# Altium PCB final design- mpu centred(Altium).pcbdoc
Units mil, origin at the board's own origin, x right, y up, seen from the top; angles counter-clockwise.
Board outline 4770 x 4410 mil, 2 copper layers (Top Layer, Bottom Layer); 66 components, 78 nets, 248 pads, 33 vias.
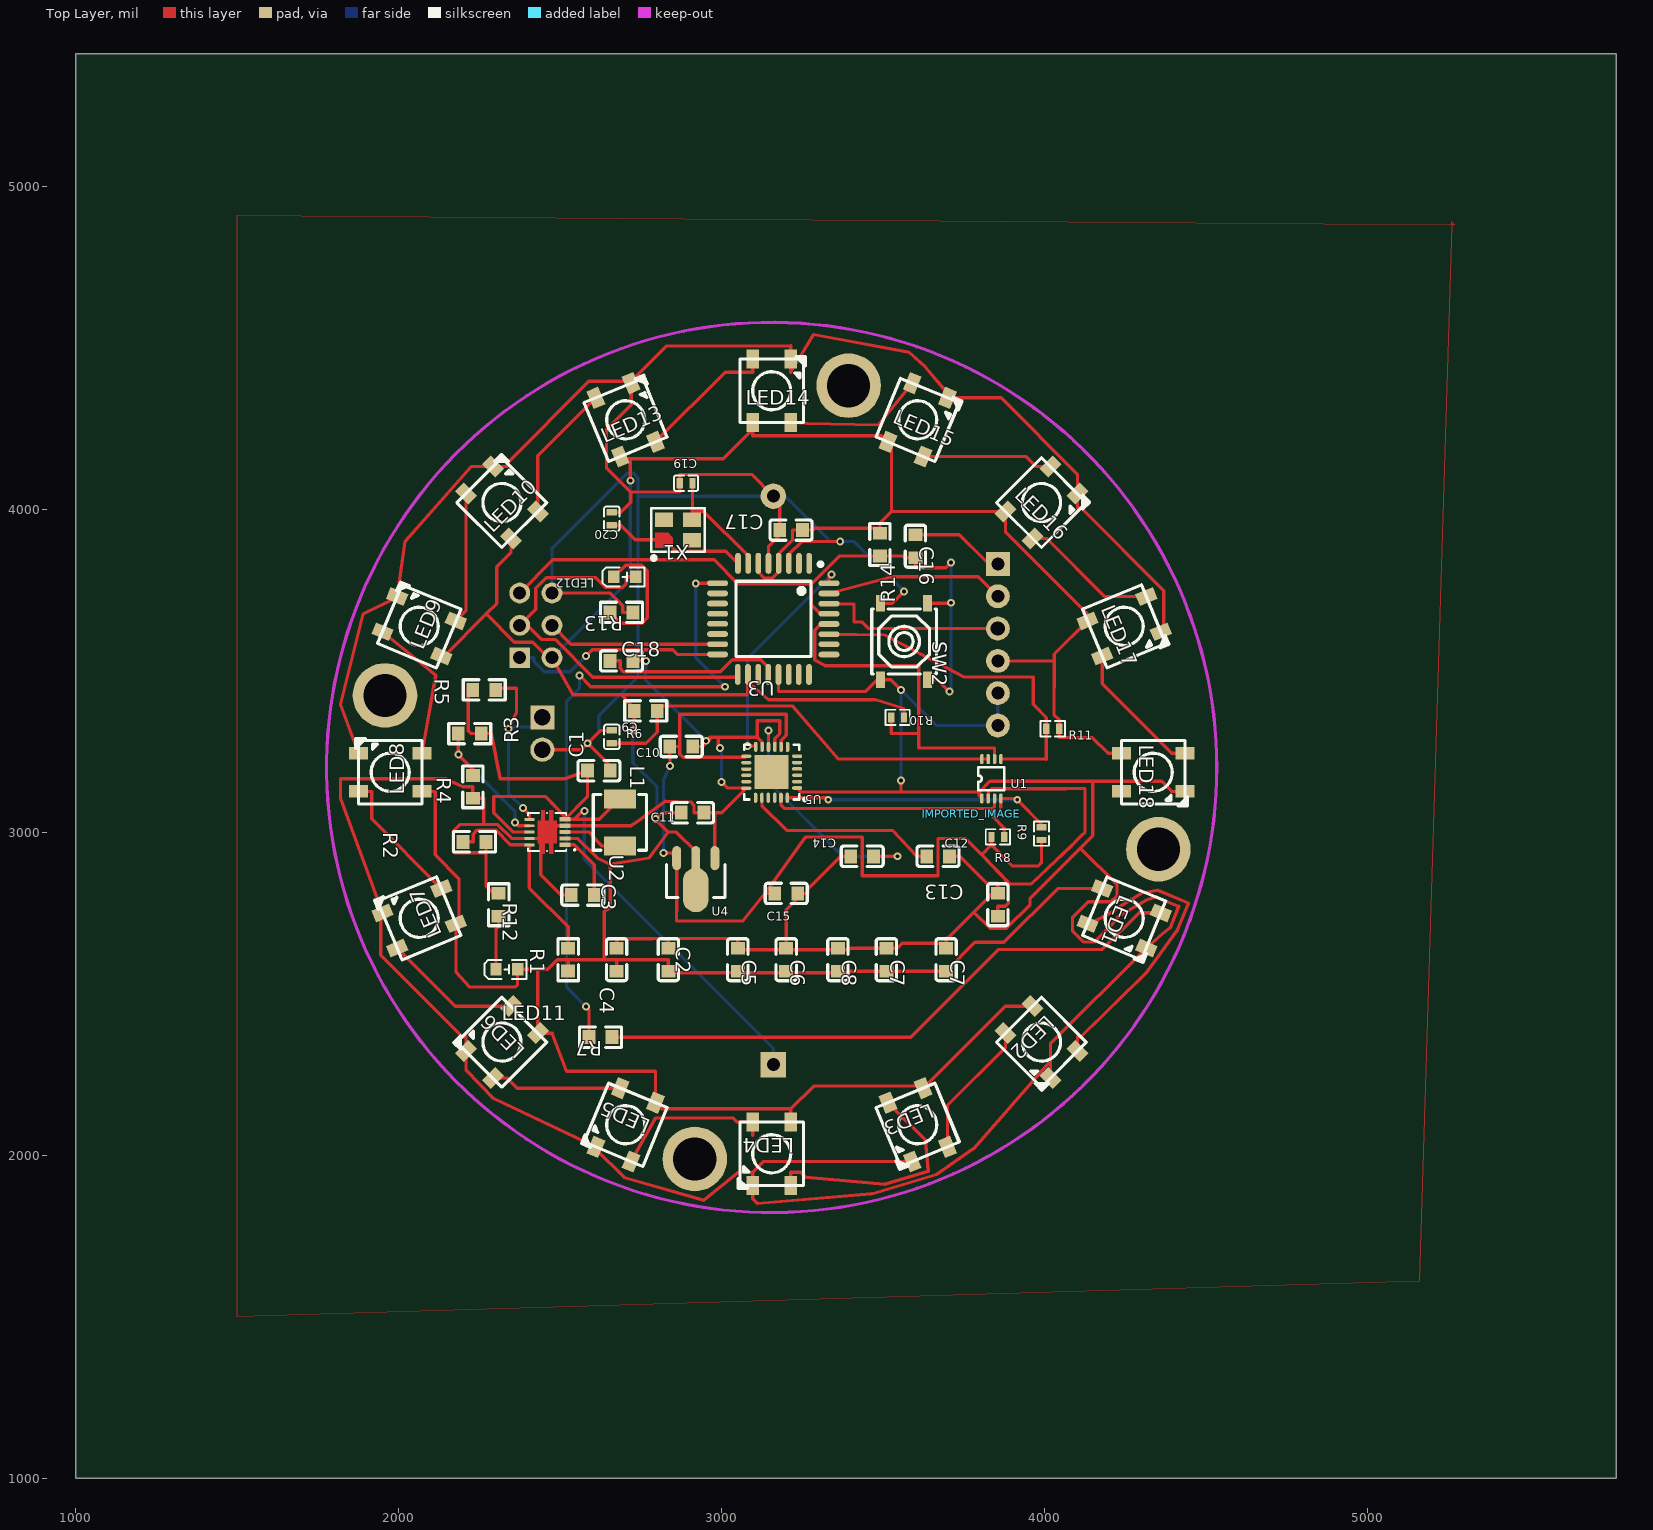
[diagram p0: Top Layer view]
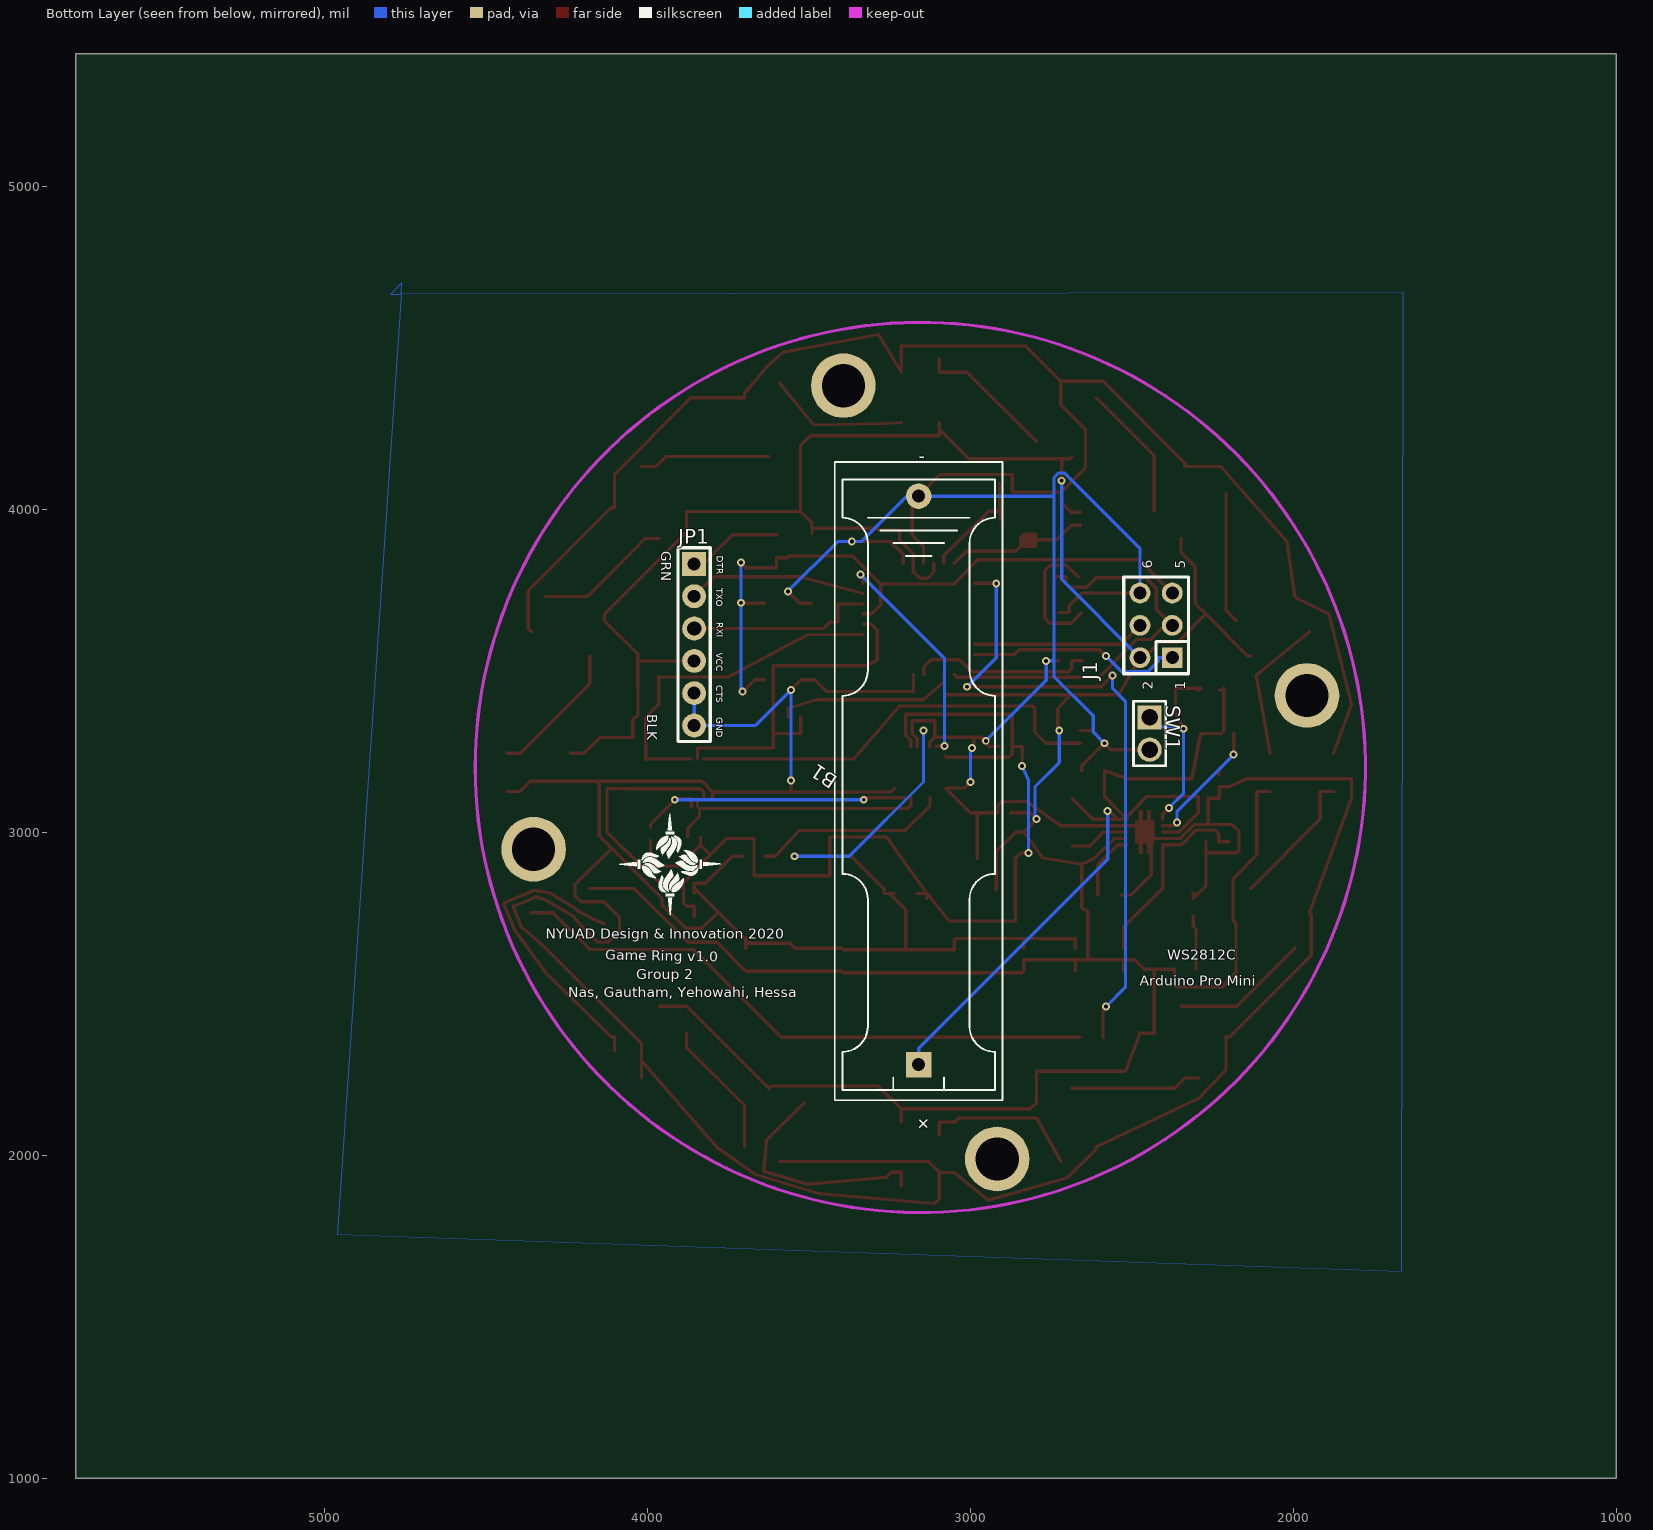
[diagram p1: Bottom Layer view, seen from below]

## Layer stack, top to bottom
Top Layer: signal copper (thickness not stored)
Dielectric: dielectric 12.6, FR-4, Dk 4.8
Bottom Layer: signal copper (thickness not stored)

## Board outline
5770,1000 1000,1000 1000,5410 5770,5410

## Components (designator, comment, footprint, x,y, rotation, side; value= is the part's Value field where it differs from the comment)
B1 "BS-2-1" KEYSTONE_2466_1XAAA 3160,3160 r270 bottom
C1 "10uF" C0603 2620,3190 r180 top
C2 "10uF" C0603 2835,2605 r270 top
C3 "1uF" C0603 2570,2805 r0 top
C4 "10uF" C0603 2675,2605 r270 top
C5 "1uF" C0603 3050,2605 r270 top
C6 "1uF" C0603 3200,2605 r270 top
C7 "1uF" C0603 3695,2605 r270 top
C7 "1uF" C0603 3510,2605 r270 top
C8 "1uF" C0603 3360,2605 r270 top
C9 "100pF" C0402 2660,3295 r270 top
C10 "10uF" C0603 2875,3265 r180 top
C11 "10uF" C0603 2910,3060 r180 top
C12 "2.2nF" C0603 3670,2925 r180 top
C13 "100nF" C0603 3855,2775 r270 top
C14 "100nF" C0603 3435,2925 r0 top
C15 "10nF" C0603 3200,2810 r180 top
C16 "100nF" C0603 3600,3885 r270 top
C17 "100nF" C0603 3215,3935 r180 top
C18 "100nF" C0603 2690,3530 r0 top
C19 "10pF" C0402 2890,4080 r0 top
C20 "10pF" C0402 2660,3970 r270 top
IMPORTED_IMAGE "IMPORTED_IMAGE" IMPORTED_IMAGE 3772.55,3056.6 r0 top
J1 "ICSP" HEADER_PRG_2X03 2425,3640 r270 bottom
JP1 "FTDI" FTDI 3855,3580 r90 bottom
L1 "2.2uH" IND-SMD_L4.4-W4.2 2685,3030 r270 top
LED1 "WS2812C" LED-SMD_4P-L5.0-W5.0-BL 4246.18,2732.99 r247.5 top
LED2 "WS2812C" LED-SMD_4P-L5.0-W5.0-BL 3990.16,2349.84 r225 top
LED3 "WS2812C" LED-SMD_4P-L5.0-W5.0-BL 3607.01,2093.82 r202.5 top
LED4 "WS2812C" LED-SMD_4P-L5.0-W5.0-BL 3155,2003.9 r180 top
LED5 "WS2812C" LED-SMD_4P-L5.0-W5.0-BL 2702.99,2093.82 r157.5 top
LED6 "WS2812C" LED-SMD_4P-L5.0-W5.0-BL 2319.84,2349.84 r135 top
LED7 "WS2812C" LED-SMD_4P-L5.0-W5.0-BL 2063.82,2732.99 r112.5 top
LED8 "WS2812C" LED-SMD_4P-L5.0-W5.0-BL 1973.9,3185 r90 top
LED9 "WS2812C" LED-SMD_4P-L5.0-W5.0-BL 2063.82,3637.01 r67.5 top
LED10 "WS2812C" LED-SMD_4P-L5.0-W5.0-BL 2319.84,4020.16 r45 top
LED11 "MHT192WDT-C2" LED0603-RD 2335,2575 r0 top
LED12 "MHT192WDT-C2" LED0603-RD 2700,3790 r0 top
LED13 "WS2812C" LED-SMD_4P-L5.0-W5.0-BL 2702.99,4276.18 r22.5 top
LED14 "WS2812C" LED-SMD_4P-L5.0-W5.0-BL 3155,4366.1 r0 top
LED15 "WS2812C" LED-SMD_4P-L5.0-W5.0-BL 3607.01,4276.18 r337.5 top
LED16 "WS2812C" LED-SMD_4P-L5.0-W5.0-BL 3990.16,4020.16 r315 top
LED17 "WS2812C" LED-SMD_4P-L5.0-W5.0-BL 4246.18,3637.01 r292.5 top
LED18 "WS2812C" LED-SMD_4P-L5.0-W5.0-BL 4336.1,3185 r270 top
R1 "1.8M" R0603 2525,2605.04 r270 top
R2 "200K" R0603 2235,2970 r180 top
R3 "51K" R0603 2220,3305 r0 top
R4 "270K" R0603 2230,3140 r90 top
R5 "51K" R0603 2265,3440 r0 top
R6 "200K" R0603 2765,3375 r180 top
R7 "330" R0603 2625,2365 r180 top
R8 "2.2K" R0402 3855,2985 r180 top
R9 "2.2K" R0402 3990,2995 r270 top
R10 "2.2K" R0402 3545,3355 r0 top
R11 "2.2K" R0402 4025,3320 r0 top
R12 "470" R0603 2310,2775 r270 top
R13 "470" R0603 2690,3680 r180 top
R14 "10K" R0603 3490,3890 r90 top
SW1 "Header-Male-2.54_1x2" HDR-2X1/2.54 2445,3305 r0 bottom
SW2 "TS-1187A-B-A-B" SW-SMD_4P-L5.1-W5.1-P3.70-LS6.4 3565,3590 r270 top
U1 "PCA9306DCUR" VSSOP-8_L2.4-W2.1-P0.50-LS3.2-BL 3835,3165 r0 top
U2 "TPS61200DRCR" VSON-10_L3.0-W3.0-P0.50-BL-EP_TPS62410DRCR 2460,3000 r90 top
U3 "ATMEGA328P-AU" TQFP-32_L7.0-W7.0-P0.80-LS9.0-BL 3160,3660 r180 top
U4 "HT7533-1_C14289" SOT-89-3_L4.5-W2.5-P1.50-LS4.2-BR 2920,2870 r90 top
U5 "MPU-6050_C24112" QFN-24_4X4X05P 3155,3185 r180 top
X1 "16MHz" OSC-SMD_4P-L3.2-W2.5-BL 2865,3935 r0 top

## Footprints (in the part's own frame and the unit in brackets; to place one, negate y for a bottom-side part, rotate by r counter-clockwise, add the part's x,y. Pads: shape width x height; smd on the part's side, far side on the other; paste and mask are expansions set on the pad)
C0402 [mm]
  rect 0.5x0.8 smd: 1(-0.5,0) 2(0.5,0)
  silkscreen extent -0.95,-0.6 0.95,0.6
C0603 [mm]
  rect 1x1.1 smd: 1(-0.9,0) 2(0.9,0)
  silkscreen extent -1.65,-0.8 1.65,0.8
FTDI [mil]
  rect 74x74 hole 40: 1(250,0)
  round 74 hole 40: 2(150,0) 4(-50,0) 5(-150,0) 6(-250,0)
  round 74 hole 44.4: 3(50,0)
  silkscreen extent -300,-50 300,50
HDR-2X1/2.54 [mm]
  rect 1.9x1.9 hole 1.3: 1(0,-1.27)
  round 1.9 hole 1.3: 2(0,1.27)
  silkscreen extent -1.27,-2.54 1.27,2.54
HEADER_PRG_2X03 [mil]
  rect 64.3x64.3 hole 40.2: 1(100,50)
  round 64.3 hole 40.2: 2(100,-50) 3(0,50) 4(0,-50) 5(-100,50) 6(-100,-50)
  silkscreen extent -150,-100 150,100
IMPORTED_IMAGE [mil]
IND-SMD_L4.4-W4.2 [mm]
  rect 1.5x2.5 smd: 1(-1.85,0) 2(1.85,0)
  silkscreen extent -2.2,-2.1 2.2,2.1
KEYSTONE_2466_1XAAA [mm]
  rect 2x2 hole 1.02: 1(22.35,0)
  round 2 hole 1.02: 2(-22.349,0)
  silkscreen extent -25.05,-6.6 25.15,6.6
LED0603-RD [mm]
  rect 0.9x1 smd: 1(-0.85,0) 2(0.85,0)
  silkscreen extent -1.75,-0.75 1.55,0.75
LED-SMD_4P-L5.0-W5.0-BL [mil]
  rect 39.3x59 smd: 1(-59.05,-98.42) 2(59.05,-98.42)
  rect 39.3x59.1 smd: 3(59.05,98.43) 4(-59.05,98.43)
  silkscreen extent -98,-98 104,106
OSC-SMD_4P-L3.2-W2.5-BL [mm]
  round 0 smd: 1(-1.1,-0.8)
  rect 1.4x1.15 smd: 2(1.1,-0.8) 3(1.1,0.8) 4(-1.1,0.8)
  Top Layer region: -1.8,-0.225 -0.762,-0.225 -0.4,-0.604 -0.4,-1.375 -1.8,-1.375
  silkscreen extent -2.1,-2.35 2.1,1.7
QFN-24_4X4X05P [mm]
  oval 0.796x0.28 smd: 1(-2,1.232) 2(-2,0.732) 3(-2,0.231) 4(-2,-0.267) 5(-2,-0.767) 6(-2,-1.267) 13(2,-1.257) 14(2,-0.757) 15(2,-0.257) 16(2,0.241) 17(2,0.742) 18(2,1.242)
  oval 0.28x0.796 smd: 7(-1.245,-2) 8(-0.744,-2) 9(-0.244,-2) 10(0.254,-2) 11(0.754,-2) 12(1.255,-2) 19(1.27,2) 20(0.77,2) 21(0.269,2) 22(-0.229,2) 23(-0.729,2) 24(-1.229,2)
  rect 2.68x2.68 smd: 25(0,-0.013)
  silkscreen extent -2.84,-2.16 2.15,2.35
R0402 [mm]
  rect 0.5x0.8 smd: 1(-0.5,0) 2(0.5,0)
  silkscreen extent -0.95,-0.6 0.95,0.6
R0603 [mm]
  rect 1x1.1 smd: 1(-0.9,0) 2(0.9,0)
  silkscreen extent -1.65,-0.8 1.65,0.8
SOT-89-3_L4.5-W2.5-P1.50-LS4.2-BR [mm]
  oval 1.9x0.7 smd: 1(1.25,-1.501) 3(1.25,1.501)
  oval 3.5x2 smd: 2(-1.25,0)
  oval 2.1x0.7 smd: 2(1.151,0)
  silkscreen extent -1.85,-2.3 0.75,2.3
SW-SMD_4P-L5.1-W5.1-P3.70-LS6.4 [mil]
  rect 51.18x27.56 smd: 1(-118.1,72.84) 2(118.11,72.84) 3(-118.1,-72.83) 4(118.11,-72.83)
  silkscreen extent -100,-100 100,100
TQFP-32_L7.0-W7.0-P0.80-LS9.0-BL [mm]
  oval 0.45x1.65 smd: 1(-2.817,-4.369) 2(-2.017,-4.369) 3(-1.217,-4.369) 4(-0.417,-4.369) 5(0.381,-4.369) 6(1.181,-4.369) 7(1.981,-4.369) 8(2.781,-4.369) 17(2.791,4.369) 18(1.991,4.369) 19(1.191,4.369) 20(0.391,4.369) 21(-0.406,4.369) 22(-1.207,4.369) 23(-2.007,4.369) 24(-2.807,4.369)
  oval 1.65x0.45 smd: 9(4.381,-2.804) 10(4.381,-2.004) 11(4.381,-1.204) 12(4.381,-0.404) 13(4.381,0.394) 14(4.381,1.194) 15(4.381,1.994) 16(4.381,2.794) 25(-4.381,2.804) 26(-4.381,2.004) 27(-4.381,1.204) 28(-4.381,0.404) 29(-4.381,-0.394) 30(-4.381,-1.194) 31(-4.381,-1.994) 32(-4.381,-2.794)
  silkscreen extent -3.86,-4.45 2.94,2.95
VSON-10_L3.0-W3.0-P0.50-BL-EP_TPS62410DRCR [mm]
  rect 0.34x0.85 smd: 1(-1,-1.4) 2(-0.5,-1.4) 3(0,-1.4) 4(0.5,-1.4) 5(1,-1.4)
  rect 0.23x0.8 smd: 6(1,1.4) 7(0.5,1.4) 8(0,1.4) 9(-0.5,1.4) 10(-1,1.4)
  round 0 smd: 11(0.005,0)
  Top Layer region: -0.89,-0.76 -0.89,-0.47 -1.71,-0.47 -1.71,-0.18 -0.88,-0.18 -0.88,0.18 -1.71,0.18 -1.71,0.47 -0.88,0.47 -0.88,0.76 0.89,0.76 0.89,0.47 1.71,0.47 1.71,0.18 0.89,0.18 0.89,-0.18 1.71,-0.18 1.71,-0.47 0.89,-0.47 0.89,-0.76 -0.89,-0.76 -0.89,-0.76 -0.89,-0.76
  silkscreen extent -1.5,-2.21 1.5,1.52
VSSOP-8_L2.4-W2.1-P0.50-LS3.2-BL [mm]
  oval 0.28x0.796 smd: 1(-0.75,-1.55) 2(-0.25,-1.55) 3(0.25,-1.55) 4(0.75,-1.55) 5(0.75,1.55) 6(0.25,1.55) 7(-0.25,1.55) 8(-0.75,1.55)
  silkscreen extent -1.02,-0.9 1,0.9

## Free pads (board coordinates)
  round 200 hole 133.86: 3(1957.99,3423.11) 3(2916.89,1987.99) 3(3393.11,4382.01) 3(4352.01,2946.89)

## Via types
v1: diameter 24.41, hole 12, Top Layer to Bottom Layer, 25 vias
v2: diameter 24.41, hole 12.2, Top Layer to Bottom Layer, 8 vias

## Nets (pads, with @x,y where several pads share a name; then routed paths per layer and width w, separated by ;. In a path a pad name is that pad's centre, name@x,y a point inside that pad or via, vN(x,y) a via of type N, cw(c..) or ccw(c..) an arc to the next point about the centre after c; other vN are vias at no path point)
3.3V: C10.2 C13.2 C15.2 R8.2 R9.2 U1.2 U4.3 U5.8 U5.13 | length 4089.6
  Top Layer w10: C10.2 v1(2840,3205)
  Top Layer w10.24: v1(2820,2935) 2845.1,2935 U4.3 2860.9,2777.6 2860,2725 3065,2725 3133.4,2810 C15.2 ; C10.2 2870.8,3265 ; U5.13 3073.6,3231.8 2880.5,3231.8 2870.8,3241.6 2870.8,3265 ; 3135,2795 3135,2810.6 3260,2985 3435,2985 3435,2935 3435,2890 3435,2865 3670,2865 3670,2885 3670,2980 3755,2980 3805,2930 ; U5.8 3185,3285 3200,3300 3200,3365 2870.8,3365 2870.8,3265 ; U1.2 3825.2,3122.8 3836.4,3134 4066.8,3134 4125,3135 4125,3000 4115,2990 4100,2975 4085,2960 3959.2,2839.4 3891.1,2839.4 ; 3835,2960 3805,2930 ; R8.2 3835.3,2957.7 3837.3,2957.7 3900,2895 3980,2895 3990,2905 R9.2 ; C13.2 3855,2770.8 3878.4,2770.8 3888.2,2780.5 3888.2,2836.5 3891.1,2839.4 ; 3805,2930 3891.1,2839.4
  Bottom Layer w10: v1(2820,2935) 2820,3160 v1(2840,3205)
5V: C2.2 C4.2 C5.2 C6.2 C7.2 C8.2 C11.2 C17.1 J1.2 JP1.4 LED1.1 LED2.1 LED3.1 LED4.1 LED5.1 LED6.1 LED7.1 LED8.1 LED9.1 LED10.1 LED11.2 LED13.1 LED14.1 LED15.1 LED16.1 LED17.1 LED18.1 R1.2 R6.2 R10.2 R11.2 R14.2 U2.2 U3.4 U3.6 U3.18 U4.2 | length 12597
  Top Layer w10: LED7.1@2177.35,2716.1 2177.35,2567.65 2220,2520 2360,2520 2368.46,2526.54 LED11.2 ; C4.2 2675,2604.6 ; v1(2725,3315) 2729.57,3319.57 R6.2 ; JP1.4 4030,3530
  Top Layer w10.24: LED8.1@2072.3,3125.9 2113.3,3125.9 2113.3,2929.7 2186.9,2856.2 2186.9,2725.6 LED7.1@2177.4,2716.1 ; LED9.1 2141,3544.8 2271.5,3675.2 ; LED10.1 2347.7,3864.7 2303.6,3820.7 2303.6,3707.4 2271.5,3675.2 ; LED11.2 2431.2,2575 ; U2.2@2515.1,2980 2555,2980 2614.6,2920.4 2655,2900 ; R1.2 2525,2604.6 ; LED13.1@2686.1,4162.6 2692.8,4155.9 2717.4,4155.9 ; v2(2717.4,4087.7) 2717.4,4155.9 ; R6.2 2729.57,3382.63 2690,3425 ; C2.2@2835,2568.4 2838.8,2564.6 3050,2564.6 3200,2564.6 3360,2564.6 3376.6,2564.6 3393.2,2564.6 3398.2,2569.6 3510,2569.6 3695,2569.6 3784.1,2658.7 3873.7,2658.7 4040.2,2825.2 LED1.1@4177.9,2825.2 ; C2.2@2835,2573.8 2835,2605 2720,2605 2708.2,2604.6 2675,2604.6 2636.4,2604.6 ; C11.2 2843.4,3060 2815,3060 v1(2795,3040) 2835,3000 ; U4.2@2920,2820.8 2920,2915.3 2920,2940 2860,3000 2835,3000 ; LED14.1 LED14.1@3096,4247.2 ; U3.6 3113.5,3805.1 3132.5,3786.1 3156.1,3786.1 3176.4,3806.4 U3.4 3176.4,3861 3219.2,3903.8 3219.2,3935 C17.1 3250.9,3935 3281.6,3935 3287.7,3941 R14.2@3490,3941 ; LED4.1@3214.1,2102.3 3214.1,2122.8 3214.1,2143.3 ; R14.2 R14.2@3490,3941 ; R10.2 3564.7,3382.3 3475,3410 3145,3410 3081.6,3465 U3.18 3080,3425 2690,3425 ; LED2.1 3877.8,2461.2 LED3.1 3617.3,2213.9 3284.7,2213.9 3214.1,2143.3 ; LED17.1@4132.65,3653.9 4030,3551.25 4030,3530 4028.8,3363.2 4044.7,3347.3 R11.2 4044.7,3292.7 4148,3292.7 4196.7,3244 LED18.1 ; LED17.1 4132.7,3673.8 3878.8,3927.7 LED16.1 3525.7,3992.3 ; 2271.5,3675.2 2358.6,3588 2415.2,3588 2463.2,3540 J1.2 2540,3425 2670,3425 2690,3425 ; 2431.2,2575 2462.3,2575 2491.8,2604.6 2525,2604.6 ; 2431.2,2575 LED6.1 2475.3,2377.7 2520,2260 2795,2260 2795,2225 2795.2,2162.1 2814,2143.3 3214.1,2143.3 ; 2525,2604.6 2636.4,2604.6 ; 2636.4,2604.6 2636.4,2754.1 2655,2765 2655,2900 ; 2655,2900 2775,2920 2835,3000 ; 2717.4,4155.9 3004.7,4155.9 LED14.1@3096,4247.2 ; LED14.1@3096,4247.2 3096,4226.7 3496,4226.7 LED15.1 3525.7,4196.9 3525.7,3992.3 ; R14.2@3490,3941 3490,3956.6 3525.7,3992.3
  Bottom Layer w10: v1(2725,3315) 2725,3215 2800,3140 2800,3045 v1(2795,3040)
  Bottom Layer w10.24: J1.2 2717.4,3782.4 v2(2717.4,4087.7)
A0: U3.23
A1: U3.24
A2: U3.25
A3: U3.26
A6: U3.19
A7: U3.22
D1_OUT_D2_IN: LED1.2 LED2.4 | length 938.9
  Top Layer w10.24: LED2.4 4101.5,2366.1 4112.5,2366.1 4315,2565 4410,2695 4445,2780 4350,2820 4301.3,2811.2 4225,2765 4215,2755 4165,2730 LED1.2
D2_OUT_D3_IN: LED2.2 LED3.4 | length 426.6
  Top Layer w10.24: LED3.4 3699.2,2154 3878.8,2333.6 LED2.2
D3: U3.1
D3_OUT_D4_IN: LED3.2 LED4.4 | length 740.7
  Top Layer w10.24: LED4.4@3214.1,1905.5 3214.1,1946.5 3245.2,1946.5 3260.6,1931.1 3505,1910 3640,1950 3631.3,2045.6 LED3.2@3514.8,2162.1
D4: U3.2
D4_OUT_D5_IN: LED4.2 LED5.4 | length 501.4
  Top Layer w10.24: LED5.4 2795,2115 3035,2115 3047.68,2102.32 LED4.2 ; 3096,2061.3 LED4.2
D5_OUT_D6_IN: LED5.2 LED6.4 | length 407.1
  Top Layer w10.24: LED6.4 2336.1,2238.5 2367.2,2207.3 LED5.2
D6: U3.10
D6_OUT_D7_IN: LED6.2 LED7.4 | length 426.6
  Top Layer w10.24: LED7.4 2175.1,2461.2 LED6.2
D7: U3.11
D7_OUT_D8_IN: LED7.2 LED8.4 | length 431.1
  Top Layer w10.24: LED8.4@1875.5,3125.9 1916.5,3125.9 1916.5,3040.8 LED7.2
D8: U3.12
D8_OUT_D9_IN: LED8.2 LED9.4 | length 457.7
  Top Layer w10.24: LED9.4 2115,3485 LED8.2
D9: U3.13
D9_OUT_D10_IN: LED9.2 LED10.4 | length 407
  Top Layer w10.24: LED9.2@2177.4,3653.9 2208.5,3685 LED10.4
D10: U3.14
D10_OUT_D11_IN: LED10.2 LED13.4 | length 426.6
  Top Layer w10.24: LED10.2 2431.2,4164.9 LED13.4
D11: J1.4 U3.15 | length 536.7
  Top Layer w10.24: J1.4 2533.5,3581.5 U3.15
D11_OUT_D12_IN: LED13.2 LED14.4 | length 431.1
  Top Layer w10.24: LED13.2 3010.9,4423.5 3096,4423.5 LED14.4
D12: J1.1 U3.16 | length 670.9
  Top Layer w10.24: v2(2580.6,3545.1) 2599.5,3564 2848.9,3564 2862.9,3550 U3.16
  Bottom Layer w10.24: J1.1 2418.7,3540 2418.7,3529.1 2451.4,3496.3 2531.8,3496.3 v2(2580.6,3545.1)
D12_OUT_D13_IN: LED14.2 LED15.4 | length 438
  Top Layer w10.24: LED14.2@3214.1,4267.7 3265,4265 3485,4260 LED15.4
D13: J1.3 LED12.2 U3.17 | length 1241.3
  Top Layer w10.24: LED12.2 2704.2,3790 2704.2,3768.1 2693.9,3757.7 2639.9,3757.7 2610.2,3787.4 2457,3787.4 2425,3755.4 2425,3690 J1.3 2398.5,3640 2442.2,3596.3 2484.2,3596.3 2600.9,3479.7 3041.8,3479.7 U3.17
D13_OUT_D14_IN: LED15.2 LED16.4 | length 407
  Top Layer w10.24: LED15.2@3623.9,4162.6 3942.8,4162.6 3973.9,4131.5 LED16.4
D14_OUT_D15_IN: LED16.2 LED17.4 | length 426.6
  Top Layer w10.24: LED16.2 4006.4,3908.8 4186,3729.2 LED17.4
D15_OUT_D16_IN: LED17.2 LED18.4 | length 431.1
  Top Layer w10.24: LED17.2@4177.9,3544.8 4177.9,3459.7 4393.5,3244 LED18.4
D16_OUT_D17_IN: LED18.2
DTR: C16.1 JP1.1 | length 292.4
  Top Layer w10.24: C16.1 3736.1,3920.4 3806.5,3850 3826.5,3830 JP1.1
FB: R1.1 R2.2 U2.10 | length 623.2
  Top Layer w10.24: R2.2 2230.8,2970 2230.8,2993.4 2244,3006.7 2300.3,3006.7 2346.3,2960.6 U2.10 2404.9,2826.7 2525,2706.6 R1.1
GND: B1.2 C1.1 C2.1 C3.1 C4.1 C5.1 C6.1 C7.1 C8.1 C9.1 C10.1 C11.1 C12.1 C13.1 C14.1 C15.1 C17.2 C18.2 C19.1 C20.1 J1.6 JP1.5 JP1.6 LED1.3 LED2.3 LED3.3 LED4.3 LED5.3 LED6.3 LED7.3 LED8.3 LED9.3 LED10.3 LED13.3 LED14.3 LED15.3 LED16.3 LED17.3 LED18.3 R2.1 R4.1 R12.1 R13.1 SW1.2 SW2.3 SW2.4 U1.1 U2.4 U2.9 U2.11 U3.3 U3.5 U3.21 U4.1 U5.1 U5.9 U5.11 U5.18 | length 22427.1
  Top Layer w10: LED8.3 1820,3395 1890,3675 1991.25,3725 LED9.3 ; SW1.2 2565,3255 v1(2585,3275) ; v1(3000,3155) 3018.9,3136.1 U5.18 ; SW2.3 3528.11,3708.11 v1(3565,3745) ; 3555,3123.9 v1(3555,3160)
  Top Layer w10.24: LED9.3 2020,3900 2224.8,4131.5 LED10.3 2336.1,4131.5 2336.1,4142.5 2589.3,4395.7 LED13.3@2719.9,4395.7 ; R2.1 2270.4,2935.9 ; R12.1 2310,2794.8 2270.4,2834.4 2270.4,2935.9 ; J1.6 2654.8,3740 2694.2,3700.6 2694.2,3680 R13.1 ; C3.1 2503.4,2805 2440.3,2868.1 2440.3,2980.3 ; v1(2585,3275) 2585.32,3274.68 v1@2585.52,3274.68 ; C1.1 2655.43,3204.77 v1@2585.52,3274.68 ; C9.1 2625.48,3314.68 v1@2585.5,3274.7 ; C20.1 2687.3,3989.7 2718.8,4021.2 2718.8,4052.7 ; C4.1 2675,2670 2770,2670 2785,2670 2818.4,2670.4 2835,2670.4 ; C18.2 v2(2765.3,3530) ; C2.1 2835,2670.4 ; C10.1 2941.6,3265 2963.2,3286.5 2963.2,3293.5 ; v2(2952.2,3282.6) 2963.2,3293.5 ; U4.1 2979.1,3060 ; 2989.85,3293.5 2989.85,3265.15 v1(2995,3260) ; U5.18 3000.2,3060 2979.1,3060 ; U5.11 3125.3,3278.4 3110.1,3293.5 ; U3.5 3145,3883.8 3179.6,3918.4 C17.2 3179.6,4020.3 B1.2 3092.7,4107.2 2870.3,4107.2 C19.1 2870.3,4070.5 2870.3,4052.7 2718.8,4052.7 ; U5.9 3164.6,3289.6 3180,3305 3180,3310 3180,3345 3110,3345 3110.1,3293.5 ; U3.21 3176,3435 3445,3435 3481.89,3471.89 SW2.4 3523.11,3471.89 v1(3555,3440) ; U3.3 3207.9,3859.7 3247.5,3899.3 v2(3367.1,3899.3) ; U5.1 3246.4,3123.9 3797.3,3123.9 ; C15.1 C15.1@3251,2810 ; C14.1 3368.4,2925 3266.6,2823.3 3266.6,2810 C15.1@3251,2810 ; LED3.3 3129.7,1980.3 3096,1946.5 ; C7.1@3695,2640.4 C7.1@3695,2656 ; C12.1 3736.6,2925 3820,2841.6 3855,2841.6 C13.1@3855,2826 ; U1.1 3797.3,3112.1 3797.3,3123.9 ; C13.1 C13.1@3855,2826 ; LED2.3 4018,2289.2 ; LED17.3 4369.1,3629.5 4369.1,3747.4 4112.5,4003.9 4101.5,4003.9 LED16.3 4101.5,4108.1 3865.1,4344.5 LED15.3 3699.2,4358.4 3630,4440 3580,4485 3285,4540 3214.1,4423.5 3214.1,4448.2 3214.1,4464.5 3214.1,4505.6 2830,4505 LED13.3@2719.9,4395.7 ; LED18.3@4434.5,3125.9 4393.5,3125.9 4362.3,3157.1 4149.2,3157.1 ; 2263.2,3023.3 2263.2,3104.6 R4.1 2230,3140 2200,3140 2145,3165 1835,3165 1820,3165 1820,3105 LED7.3 1944.7,2744.3 1944.7,2618.9 2197.5,2366.1 2208.5,2366.1 LED6.3 2208.5,2263.9 2295,2175 LED5.3 2610.8,2018.2 2697.9,1931.1 2945,1860 3050,1945 3096,1946.5 ; 2263.2,3023.3 2189.7,3023.3 2168.4,3002 2168.4,2942 2174.4,2935.9 2270.4,2935.9 ; 2263.2,3023.3 2307.2,3023.3 2350.2,2980.3 2381.6,2980.3 2400.9,2980.3 U2.9 2440.3,2980.3 ; 2440.3,2980.3 2460,3000 2479.6,3019.7 U2.4 2560,3020 2720,3020 2735,3030 2825,3095 2904.5,3093.2 2914.2,3083.4 2914.2,3060 C11.1 2979.1,3060 ; 2718.8,4052.7 2643.4,4128.2 2643.4,4245.8 2719.9,4322.3 LED13.3 LED13.3@2719.9,4395.7 ; 2835,2670.4 3046.2,2670.4 3050,2666.6 3050,2635.4 C6.1@3200,2635.4 ; 2963.2,3293.5 3110.1,3293.5 ; 3096,1946.5 LED4.3 3096,1864.4 3110,1850.4 3465,1880 3665,1940 3780,2020 4015.9,2289.2 4018,2289.2 ; C6.1@3200,2635.4 3200,2759 C15.1@3251,2810 ; C6.1@3200,2635.4 3360,2635.4 3376.6,2635.4 3393.2,2635.4 3398.2,2640.4 3510,2640.4 3543.2,2640.4 3558.8,2656 C7.1@3695,2656 ; C7.1@3695,2656 3695,2671.6 3700.6,2671.6 3781.2,2752.2 ; 3781.2,2752.2 C13.1@3855,2826 ; 3781.2,2752.2 3831.3,2702.1 3881.8,2702.1 3954.9,2775.2 3954.9,2795 4110.4,2950.6 ; 3797.3,3123.9 3830.6,3157.1 4149.2,3157.1 ; 4018,2289.2 4018,2344.2 LED1.3 4365,2685 4390,2705 4415,2770 4355,2795 4345,2800 4315,2790 4230,2740 4205,2710 4155,2660 4120,2660 4086,2694 4086,2734.9 4135.1,2784 4204.8,2784 4224.1,2803.3 4224.1,2836.9 4110.4,2950.6 ; 4110.4,2950.6 4149.2,2989.3 4149.2,3157.1
  Bottom Layer w10: v1(2995,3260) 3000,3255 v1(3000,3155) ; v1(3555,3160) v1(3555,3440)
  Bottom Layer w10.24: J1.6 2475,3878.8 2707.6,4111.4 2727.3,4111.4 2741.1,4097.5 2741.1,4039.9 ; v1(2585,3275) 2620,3310 2620,3360 2741.1,3481.1 2741.1,3536.1 ; v2(2952.2,3282.6) 2765.3,3469.5 v2(2765.3,3530) 2747.3,3530 2741.1,3536.1 ; v1(3555,3440) 3665,3330 JP1.6 3855,3434.8 JP1.5 ; v1(3565,3745) 3410.7,3899.3 v2(3367.1,3899.3) 3338.1,3899.3 3197.5,4039.9 B1.2 2741.1,4039.9 ; 2741.1,3536.1 2741.1,4039.9
L: L1.2 U2.3 | length 188.7
  Top Layer w10.24: U2.3 2550.7,3000 2555,3000 2590,3000 2619.3,2967.2 2629.34,2957.16 L1.2
LED1_4: LED1.4 R7.1 | length 1858.7
  Top Layer w10.24: R7.1 2691.6,2365 3585.7,2365 3857.3,2636.6 4179,2636.6 4292.3,2749.9 LED1.4
LED11_1: LED11.1 R12.2 | length 168.1
  Top Layer w10.24: LED11.1 2301.5,2699.9 2310,2708.4 R12.2
LED12_1: LED12.1 R13.2 | length 406.7
  Top Layer w10.24: R13.2 2687.7,3646.8 2753.6,3646.8 2769.9,3663.1 2769.9,3808.5 2752.3,3826 2702.6,3826 LED12.1
LED_DATA: R7.2 U3.9 | length 2054.7
  Top Layer w10: v1(2560,3485) 2595,3450 v1(3010,3450) ; v1(2580,2460) 2589.57,2450.43 R7.2 ; v1(2920,3770) U3.9
  Bottom Layer w10: v1(2560,3485) 2560,3445 2520,3405 2520,2520 v1(2580,2460) ; v1(2920,3770) 2920,3540 v1(3010,3450)
MPU_INT: U3.32 U5.12 | length 696.6
  Top Layer w10.24: v2(3080,3266.6) 3102.7,3266.6 U5.12 ; U3.32 3332.5,3789.6 v2(3340.5,3797.6)
  Bottom Layer w10.24: v2(3080,3266.6) 3080,3537.1 v2(3340.5,3797.6)
null: 
RESET: C16.2 J1.5 R14.1 SW2.1 SW2.2 U3.29 | length 2173.6
  Top Layer w10: SW2.2 3668.11,3471.89 v1(3705,3435) ; SW2.1 3708.11,3708.11 v1(3710,3710)
  Top Layer w10.24: J1.5 2477.7,3842.7 2977,3842.7 3051.9,3767.8 3277.2,3767.8 ; U3.29 3304.9,3675.5 3277.2,3703.1 3277.2,3767.8 ; v1(3710,3835) 3693.4,3818.4 3600,3818.4 C16.2 3566.8,3849.6 3561.8,3854.6 R14.1 3363.9,3854.6 3277.2,3767.8
  Bottom Layer w10: v1(3705,3435) 3710,3440 v1(3710,3710) v1(3710,3835)
RXI: JP1.3 U3.30 | length 605.8
  Top Layer w10: U3.30 3410,3705 3410,3650 3435,3650 3455,3630 JP1.3 JP1.3@3855,3650
S$12: 
SCL_3.3V: R8.1 U1.3 U5.23 | length 818
  Top Layer w10.24: U5.23 3183.7,3084.6 3195.4,3072.9 3838.5,3072.9 ; U1.3 3844.8,3079.2 3838.5,3072.9 ; R8.1 3874.7,3012.3 3838.5,3048.4 3838.5,3072.9
SCL_5V: R10.1 U1.6 U3.28 | length 1129.8
  Top Layer w10.24: U3.28 3307.4,3644.1 3287.9,3624.6 3287.9,3532.6 3320,3515 3610,3515 3610,3305 ; R10.1 3525.3,3341.4 3525.5,3305 3610,3305 ; U1.6 3845,3260 3610,3260 3610,3305
SDA_3.3V: R9.1 U1.4 U5.24 | length 910.3
  Top Layer w10: U5.24 3323.74,3106.26 v1(3330,3100) ; U1.4 3911.02,3103.98 v1(3915,3100) 3990,3025 R9.1
  Top Layer w10.24: 3864.5,3076.4 U1.4
  Bottom Layer w10: v1(3330,3100) v1(3915,3100)
SDA_5V: R11.1 U1.5 U3.27 | length 1077.1
  Top Layer w10.24: U3.27 3505,3610 3750,3480 3965,3480 3965,3395 4005.32,3354.68 R11.1 4005.3,3306.4 4005.3,3292.7 4005,3225 U1.5
TPS61200DRCR_EN: R5.2 SW1.1 U2.6 | length 651.8
  Top Layer w10: v1(2385,3075) 2404.88,3055.12 U2.6
  Top Layer w10.24: R5.2@2286.6,3445 2291.6,3440 R5.2 ; R5.2@2287,3445 2365,3445 2365,3370 v1(2340,3320)
  Bottom Layer w10: v1(2385,3075) 2340,3120 v1(2340,3320) 2345,3325 2405,3325 2410,3330 2420,3330 SW1.1
TXO: JP1.2 U3.31 | length 554.1
  Top Layer w10.24: U3.31 3525,3790 3795,3790 JP1.2
U1_7: C9.2 R6.1 U1.7 U1.8 | length 1331.2
  Top Layer w10: C9.2 2765.88,3275.31 2800.44,3309.87 R6.1
  Top Layer w10.24: R6.1 2800.44,3383.84 2806.6,3390 3100,3390 3220,3390 3361.3,3226 U1.8 U1.7
U2_1: C3.2 U2.1 | length 209.6
  Top Layer w10.24: U2.1 2543.4,2960.6 2605.4,2898.5 C3.2
U3_7: C19.2 U3.7 X1.3 | length 367.9
  Top Layer w10.24: X1.3 2908.3,3993.3 ; C19.2 2909.7,4002 2908.3,4000.6 2908.3,3993.3 ; U3.7 3082,3854.7 2943.4,3993.3 2908.3,3993.3
U3_8: C20.2 U3.8 X1.1 | length 439.6
  Top Layer w10.24: C20.2 2687.3,3950.3 2732.5,3905 2824.4,3905 2860,3869.3 3013.2,3869.3 U3.8
U3_20: C18.1 U3.20 | length 564.7
  Top Layer w10.24: C18.1 2685.8,3530 2685.8,3506.6 2696.1,3496.3 2996.4,3496.3 3033.5,3533.4 3121.2,3533.4 3144.6,3510 U3.20
U5_2: U5.2
U5_3: U5.3
U5_4: U5.4
U5_5: U5.5
U5_6: U5.6
U5_7: U5.7
U5_10: C14.2 U5.10 | length 781.1
  Top Layer w10: U5.10 v1(3145,3315) ; C14.2 v1(3545,2925)
  Bottom Layer w10: v1(3145,3315) 3145,3155 3375,2925 v1(3545,2925)
U5_14: U5.14
U5_15: U5.15
U5_16: U5.16
U5_17: U5.17
U5_19: U5.19
U5_20: C12.2 U5.20 | length 601.4
  Top Layer w10.24: U5.20 3124.7,3081.7 3201.4,3005 3530,3005 3603.4,2925 C12.2
U5_21: U5.21
U5_22: U5.22
U5_25: U5.25
UVLO: R3.1 R4.2 U2.7 | length 479.9
  Top Layer w10: R3.1 v1(2185,3240) 2230,3195 R4.2 ; v1(2360,3030) 2370.32,3019.68 U2.7
  Bottom Layer w10: v1(2185,3240) 2360,3065 v1(2360,3030)
V_BATT: B1.1 C1.2 L1.1 R3.2 R5.1 U2.5 U2.8 | length 2535.6
  Top Layer w10.24: R5.1 2220.8,3440 2215.8,3445 2215.8,3313.5 2224.2,3305 2239.8,3305 R3.2 2286.6,3305 ; 2287,3305 2315,3165 2515,3165 C1.2 ; 2365,3000 U2.8 ; 2377.6,3000 2355,3000 2295,3060 2295,3110 2455,3110 2515.1,3047.8 U2.5 ; v2(2575,3065) 2569,3065 2543.4,3039.4 ; C1.2 2584.56,3108.86 U2.5 ; L1.1 2621.56,3039.4 2543.4,3039.4 ; U2.5 2543.4,3039.4
  Bottom Layer w10.24: v2(2575,3065) 2575,2916 3160,2331 B1.1
X1_2: X1.2
X1_4: X1.4

## Polygon pours and split planes (outlines as drawn)
GND on Top Layer (solid): 1500,1500 1500,4910 5259.7,4880.08 5260,4890 5270,4880 5259.7,4880.08 5160,1610 1500,1500
GND on Bottom Layer (solid): 1660,4670 4762.37,4665.05 4760,4700 4795,4665 4762.37,4665.05 4960,1755 1665,1640 1660,4670

## Keep-outs
Keep-Out Layer:
  circle w10: c3155,3200 r1377.95

## Silkscreen, mask and mechanical layers (free items; w line width, h text height)
Bottom Overlay:
  text "NYUAD Design & Innovation 2020" at 4315,2669.25 h31.5
  text "WS2812C" at 2390,2604.25 h31.5
  text "Game Ring v1.0" at 4130.27,2604.25 h31.5 r1
  text "Group 2" at 4035,2544.25 h31.5
  text "Arduino Pro Mini" at 2475,2524.25 h31.5
  text "Nas, Gautham, Yehowahi, Hessa" at 4245,2489.25 h31.5

## Text inside footprints (layer, text, board x,y; h text height)
B1: Bottom Overlay "-" at 3160,4144.65 h39.37; Bottom Overlay "+" at 3173.92,2100.41 h39.37 r45
J1: Bottom Overlay "1" at 2335,3440 h30 r270; Bottom Overlay "2" at 2435,3440 h30 r270; Bottom Overlay "5" at 2335,3815 h30 r270; Bottom Overlay "6" at 2435.06,3816.31 h30 r265
JP1: Bottom Overlay "GRN" at 3956.4,3870 h30 r90; Bottom Overlay "BLK" at 4000,3365 h30 r90; Bottom Overlay "TXO" at 3785.9,3755 h20 r90; Bottom Overlay "RXI" at 3785,3650 h20 r90; Bottom Overlay "VCC" at 3785.9,3555 h20 r90; Bottom Overlay "DTR" at 3785,3855 h20 r90; Bottom Overlay "GND" at 3785.9,3355 h20 r90; Bottom Overlay "CTS" at 3785.9,3455 h20 r90